# Altium PCB XL52832.PcbDoc
Units mil, origin at the board's own origin, x right, y up, seen from the top; angles counter-clockwise.
Board outline 6209.44 x 1934.03 mil, 2 copper layers (Top Layer, Bottom Layer); 12 components, 36 nets, 228 pads, 0 vias.
Unrouted connection lines stored in the file: 2.
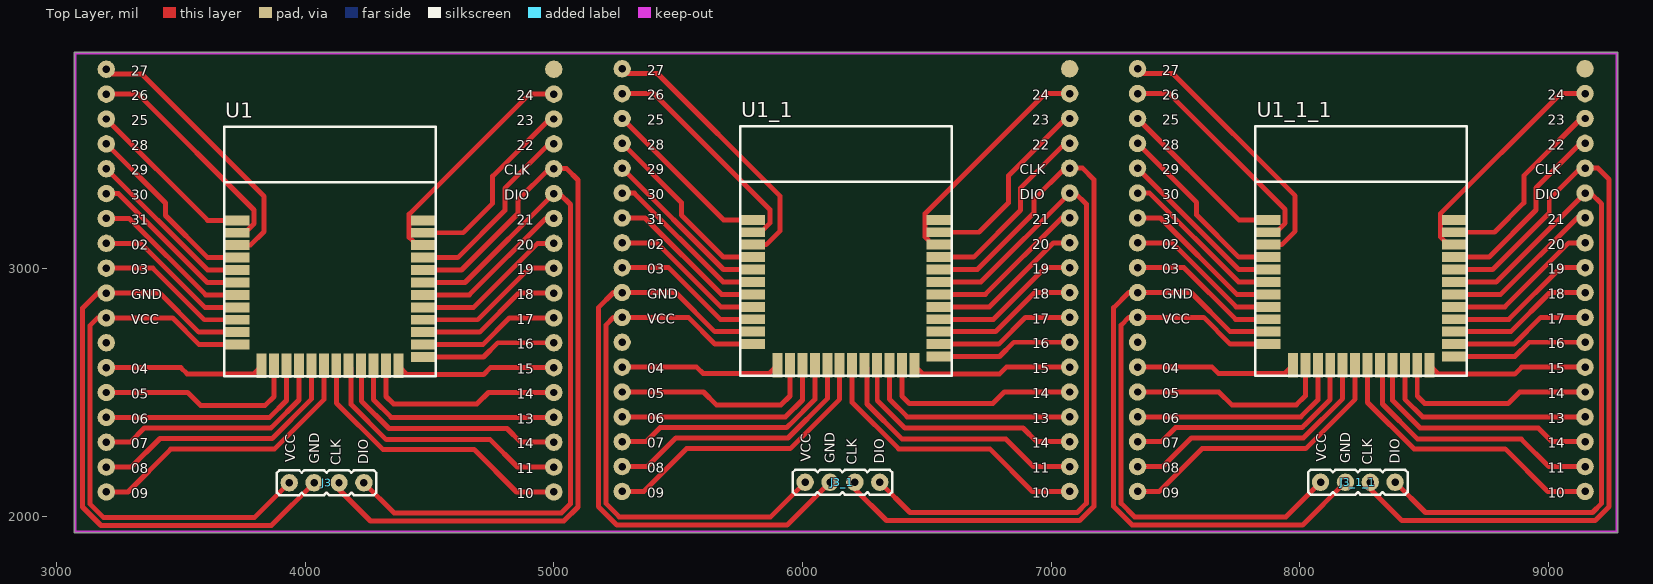
[diagram p0: Top Layer view]
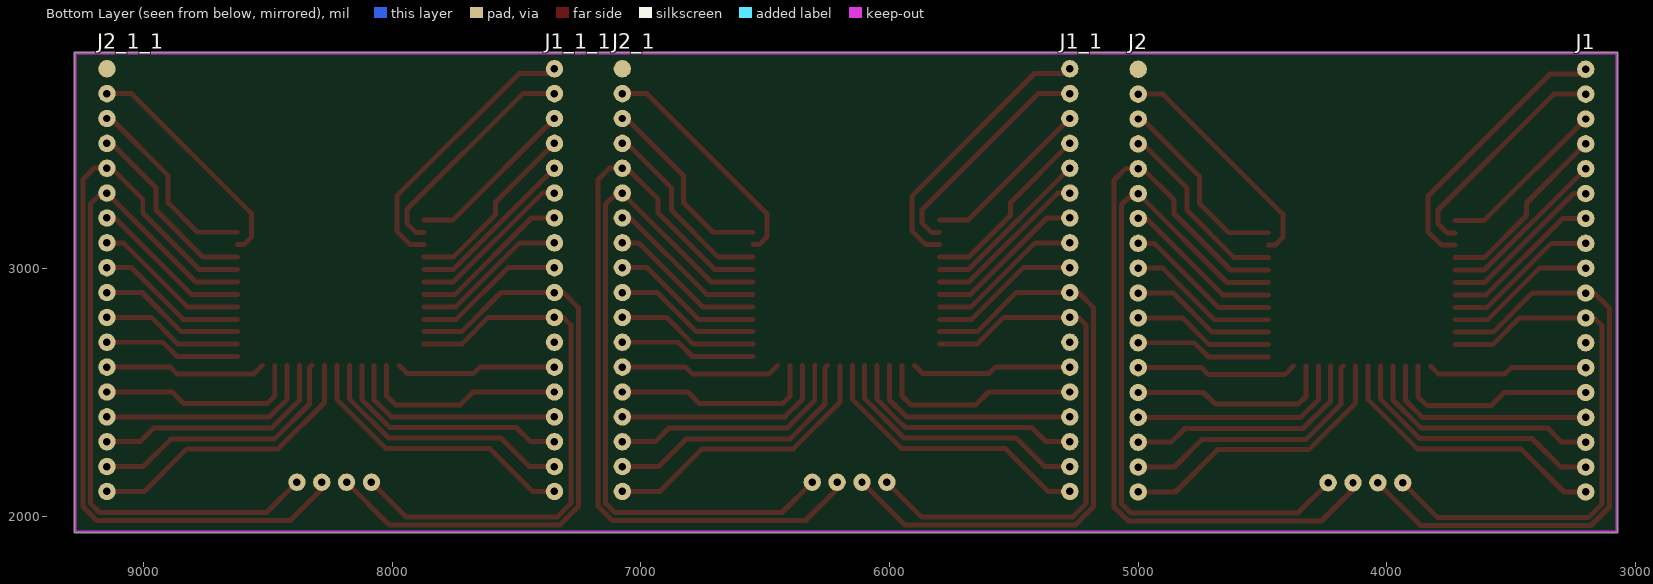
[diagram p1: Bottom Layer view, seen from below]

## Layer stack, top to bottom
Top Solder: solder mask 0.4, Solder Resist, Dk 3.5
Top Layer: signal copper 1.4
Dielectric 1: dielectric 12.6, FR-4, Dk 4.8
Bottom Layer: signal copper 1.4
Bottom Solder: solder mask 0.4, Solder Resist, Dk 3.5

## Board outline
3070.58,1940 ccw(c3075.59,1940) 3075.59,1934.98 9275,1934.98 ccw(c9275,1940) 9280.01,1940 9280.01,3864 ccw(c9275,3864) 9275,3869.01 3075.59,3869.01 ccw(c3075.59,3864) 3070.58,3864

## Design rules (kind name [scope] priority, off if disabled: settings)
Clearance [All] p1: gap=10 ignorepadtopadclearanceinfootprint=FALSE
PolygonConnect [All] p1: connectstyle=Relief reliefconductorwidth=10 reliefentries=4 polygonreliefangle="90 Angle" airgapwidth=10
RoutingVias [All] p1: holewidth=28 width=50 viastyle="Through Hole" minholewidth=28 minwidth=50 maxholewidth=28 maxwidth=50
SolderMaskExpansion [All] p1: expansion=4
Width [All] p1: maxlimit=40 minlimit=20 preferedwidth=30 minimp=50.000000 maximp=50.000000 favimp=50.000000
30 further rules are at their usual default settings.

## Classes and differential pairs
component class XL52832: J1 J2 J3 U1

## Components (designator, comment, footprint, x,y, rotation, side; value= is the part's Value field where it differs from the comment)
J1 "JP_18" JP_18#1 3050,2250 r0 bottom
J1_1 "JP_18" JP_18#1 5125,2252 r0 bottom (schematic designator J1)
J1_1_1 "JP_18" JP_18#1 7198,2252 r0 bottom (schematic designator J1)
J2 "JP_18" JP_18#2 5150,3650 r180 bottom
J2_1 "JP_18" JP_18#2 7225,3652 r180 bottom (schematic designator J2)
J2_1_1 "JP_18" JP_18#2 9298,3652 r180 bottom (schematic designator J2)
J3 "JP_4" JP_4 4236,2137 r180 top
J3_1 "JP_4" JP_4 6311,2139 r180 top (schematic designator J3)
J3_1_1 "JP_4" JP_4 8384,2139 r180 top (schematic designator J3)
U1 "XL52832-D01" XL52832-D01 4100,2900 r0 top
U1_1 "XL52832-D01" XL52832-D01 6175,2902 r0 top (schematic designator U1)
U1_1_1 "XL52832-D01" XL52832-D01 8248,2902 r0 top (schematic designator U1)

## Footprints (in the part's own frame and the unit in brackets; to place one, negate y for a bottom-side part, rotate by r counter-clockwise, add the part's x,y. Pads: shape width x height; smd on the part's side, far side on the other; paste and mask are expansions set on the pad)
JP_4 [mil]
  round 70 hole 30: 1(0,0) 2(100,0) 3(200,0) 4(300,0)
  silkscreen extent -50,-50 350,50, body extent -50,-50 350,50, height 336
JP_18#1 [mil]
  round 70 hole 30: 1(150,150) 2(150,50) 3(150,-50) 4(150,-150) 5(150,-250) 6(150,-350) 7(150,-450) 8(150,-550) 9(150,-650) 10(150,-750) 11(150,-850) 12(150,-950) 13(150,-1050) 14(150,-1150) 15(150,-1250) 16(150,-1350) 17(150,-1450) 18(150,-1550)
  body extent 100,-1600 200,200, height 336
JP_18#2 [mil]
  round 70 all layers, no hole: 1(150,150)
  round 70 hole 30: 2(150,50) 3(150,-50) 4(150,-150) 5(150,-250) 6(150,-350) 7(150,-450) 8(150,-550) 9(150,-650) 10(150,-750) 11(150,-850) 12(150,-950) 13(150,-1050) 14(150,-1150) 15(150,-1250) 16(150,-1350) 17(150,-1450) 18(150,-1550)
  body extent 100,-1600 200,200, height 336
XL52832-D01 [mil]
  rect 100x40 smd: 1(-375,292.5) 2(-375,242.5) 3(-375,192.5) 4(-375,142.5) 5(-375,92.5) 6(-375,42.5) 7(-375,-7.5) 8(-375,-57.5) 9(-375,-107.5) 10(-375,-157.5) 11(-375,-207.5) 25(375,-257.5) 26(375,-207.5) 27(375,-157.5) 28(375,-107.5) 29(375,-57.5) 30(375,-7.5) 31(375,42.5) 32(375,92.5) 33(375,142.5) 34(375,192.5) 35(375,242.5) 36(375,292.5)
  rect 0x0 smd: 12(-375,-257.5)
  rect 40x100 smd: 13(-275,-292.5) 14(-225,-292.5) 15(-175,-292.5) 16(-125,-292.5) 17(-75,-292.5) 18(-25,-292.5) 19(25,-292.5) 20(75,-292.5) 21(125,-292.5) 22(175,-292.5) 23(225,-292.5) 24(275,-292.5)
  silkscreen extent -426,-335 425,669, body extent -425,-338 425,666, height 177

## Nets (pads, with @x,y where several pads share a name; then routed paths per layer and width w, separated by ;. In a path a pad name is that pad's centre, name@x,y a point inside that pad or via, vN(x,y) a via of type N, cw(c..) or ccw(c..) an arc to the next point about the centre after c; other vN are vias at no path point)
CLK: J2.5 J3.2 U1.32 | length 3221.1
  Top Layer w20: J3.2 4136,2110 4263,1983 5040.43,1983 5097,2039.57 5097,3355 5052,3400 J2.5 4981,3400 4856,3275 4856,3220 4628.5,2992.5 U1.32
DIO: J2.6 J3.1 U1.31 | length 2859.2
  Top Layer w20: J3.1 4358,2015 5030,2015 5067,2052 5067,3256 5023,3300 J2.6 4642.5,2942.5 U1.31
GND: J1.9 J3.3 U1.10 | length 2545.1
  Top Layer w20: U1.10 3572.5,2742.5 3415,2900 J1.9 3165,2900 3104,2839 3104,2039.57 3178.57,1965 3864,1965 J3.3
NetJ1_1: J1.1 U1.18 | length 1165.2
  Top Layer w20: J1.1 3287,2100 3459,2272 3876,2272 4075,2471 U1.18
NetJ1_2: J1.2 U1.17 | length 1072.6
  Top Layer w20: J1.2 3301,2200 3416,2315 3867,2315 4025,2473 U1.17
NetJ1_3: J1.3 U1.16 | length 983.2
  Top Layer w20: J1.3 3296,2300 3353,2357 3862,2357 3875,2370 3875.43,2370 3975,2469.57 U1.16
NetJ1_4: J1.4 U1.15 | length 892.7
  Top Layer w20: J1.4 3857,2400 3925,2468 U1.15
NetJ1_5: J1.5 U1.14 | length 835
  Top Layer w20: J1.5 3527,2500 3579,2448 3839,2448 3875,2484 U1.14
NetJ1_6: J1.6 U1.13 | length 648.8
  Top Layer w20: J1.6 3500,2600 3525,2575 3792.5,2575 U1.13
NetJ1_7: J1.7 U1.12
NetJ1_10: J1.10 U1.9 | length 610.9
  Top Layer w20: J1.10 3387,3000 3594.5,2792.5 U1.9
NetJ1_11: J1.11 U1.8 | length 631.7
  Top Layer w20: J1.11 3339,3100 3596.5,2842.5 U1.8
NetJ1_12: J1.12 U1.7 | length 652.4
  Top Layer w20: J1.12 3292,3200 3599.5,2892.5 U1.7
NetJ1_13: J1.13 U1.6 | length 673.1
  Top Layer w20: J1.13 3249,3300 3606.5,2942.5 U1.6
NetJ1_14: J1.14 U1.5 | length 693.8
  Top Layer w20: J1.14 3607.5,2992.5 U1.5
NetJ1_15: J1.15 U1.4 | length 743.8
  Top Layer w20: J1.15 3438,3262 3438,3212 3607.5,3042.5 U1.4
NetJ1_16: J1.16 U1.1 | length 693.8
  Top Layer w20: J1.16 3607.5,3192.5 U1.1
NetJ1_17: J1.17 U1.2 | length 927.4
  Top Layer w20: J1.17 3328,3700 3794,3234 3794,3179 3756,3141 3726.5,3141 U1.2
NetJ1_18: J1.18 U1.3 | length 1119.2
  Top Layer w20: J1.18 3219,3781 3342,3781 3834,3289 3834,3147 3779.5,3092.5 U1.3
NetJ2_1: J2.1 U1.36
NetJ2_2: J2.2 U1.34 | length 945.1
  Top Layer w20: U1.34 4449.5,3092.5 4418,3124 4418,3217 4901,3700 J2.2
NetJ2_3: J2.3 U1.35 | length 778.4
  Top Layer w20: U1.35 4635.5,3142.5 4754,3261 4754,3370 4984,3600 J2.3
NetJ2_4: J2.4 U1.33 | length 766.6
  Top Layer w20: U1.33 4613.5,3042.5 4803,3232 4803,3321 4982,3500 J2.4
NetJ2_7: J2.7 U1.30 | length 652.4
  Top Layer w20: U1.30 4660.5,2892.5 4968,3200 J2.7
NetJ2_8: J2.8 U1.29 | length 631.7
  Top Layer w20: U1.29 4677.5,2842.5 4935,3100 J2.8
NetJ2_9: J2.9 U1.28 | length 610.9
  Top Layer w20: U1.28 4693.5,2792.5 4901,3000 J2.9
NetJ2_10: J2.10 U1.27 | length 590.2
  Top Layer w20: U1.27 4701.5,2742.5 4859,2900 J2.10
NetJ2_11: J2.11 U1.26 | length 569.5
  Top Layer w20: U1.26 4714.5,2692.5 4822,2800 J2.11
NetJ2_12: J2.12 U1.25 | length 548.8
  Top Layer w20: U1.25 4717.5,2642.5 4775,2700 J2.12
NetJ2_13: J2.13 U1.24 | length 651.3
  Top Layer w20: U1.24 4410.5,2572 4717,2572 4745,2600 J2.13
NetJ2_14: J2.14 U1.23 | length 830
  Top Layer w20: U1.23 4325,2484 4355,2454 4691,2454 4737,2500 J2.14
NetJ2_15: J2.15 U1.22 | length 890.9
  Top Layer w20: U1.22 4275,2471 4346,2400 J2.15
NetJ2_16: J2.16 U1.21 | length 984.7
  Top Layer w20: U1.21 4226,2606.5 4226,2466 4337,2355 4812,2355 4867,2300 J2.16
NetJ2_17: J2.17 U1.20 | length 1079.4
  Top Layer w20: U1.20 4185,2597.5 4185,2451.43 4326.43,2310 4744,2310 4854,2200 J2.17
NetJ2_18: J2.18 U1.19 | length 1172.8
  Top Layer w20: U1.19 4125,2458 4312,2271 4679,2271 4850,2100 J2.18
VCC: J1.8 J3.4 U1.11 | length 2247.3
  Top Layer w20: U1.11 3573.5,2692.5 3466,2800 J1.8 3165,2800 3134,2769 3134,2052 3188,1998 3797,1998 J3.4
pads on no net: J1_1.1 J1_1.2 J1_1.3 J1_1.4 J1_1.5 J1_1.6 J1_1.7 J1_1.8 J1_1.9 J1_1.10 J1_1.11 J1_1.12 J1_1.13 J1_1.14 J1_1.15 J1_1.16 J1_1.17 J1_1.18 J1_1_1.1 J1_1_1.2 J1_1_1.3 J1_1_1.4 J1_1_1.5 J1_1_1.6 J1_1_1.7 J1_1_1.8 J1_1_1.9 J1_1_1.10 J1_1_1.11 J1_1_1.12 J1_1_1.13 J1_1_1.14 J1_1_1.15 J1_1_1.16 J1_1_1.17 J1_1_1.18 J2_1.1 J2_1.2 J2_1.3 J2_1.4 J2_1.5 J2_1.6 J2_1.7 J2_1.8 J2_1.9 J2_1.10 J2_1.11 J2_1.12 J2_1.13 J2_1.14 J2_1.15 J2_1.16 J2_1.17 J2_1.18 J2_1_1.1 J2_1_1.2 J2_1_1.3 J2_1_1.4 J2_1_1.5 J2_1_1.6 J2_1_1.7 J2_1_1.8 J2_1_1.9 J2_1_1.10 J2_1_1.11 J2_1_1.12 J2_1_1.13 J2_1_1.14 J2_1_1.15 J2_1_1.16 J2_1_1.17 J2_1_1.18 J3_1.1 J3_1.2 J3_1.3 J3_1.4 J3_1_1.1 J3_1_1.2 J3_1_1.3 J3_1_1.4 U1_1.1 U1_1.2 U1_1.3 U1_1.4 U1_1.5 U1_1.6 U1_1.7 U1_1.8 U1_1.9 U1_1.10 U1_1.11 U1_1.12 U1_1.13 U1_1.14 U1_1.15 U1_1.16 U1_1.17 U1_1.18 U1_1.19 U1_1.20 U1_1.21 U1_1.22 U1_1.23 U1_1.24 U1_1.25 U1_1.26 U1_1.27 U1_1.28 U1_1.29 U1_1.30 U1_1.31 U1_1.32 U1_1.33 U1_1.34 U1_1.35 U1_1.36 U1_1_1.1 U1_1_1.2 U1_1_1.3 U1_1_1.4 U1_1_1.5 U1_1_1.6 U1_1_1.7 U1_1_1.8 U1_1_1.9 U1_1_1.10 U1_1_1.11 U1_1_1.12 U1_1_1.13 U1_1_1.14 U1_1_1.15 U1_1_1.16 U1_1_1.17 U1_1_1.18 U1_1_1.19 U1_1_1.20 U1_1_1.21 U1_1_1.22 U1_1_1.23 U1_1_1.24 U1_1_1.25 U1_1_1.26 U1_1_1.27 U1_1_1.28 U1_1_1.29 U1_1_1.30 U1_1_1.31 U1_1_1.32 U1_1_1.33 U1_1_1.34 U1_1_1.35 U1_1_1.36
copper on no net: | length 69837.5
  Top Layer w20: 5275,2102 5362,2102 5534,2274 5951,2274 6150,2473 6150,2609.5 ; 5275,2202 5376,2202 5491,2317 5942,2317 6100,2475 6100,2609.5 ; 5275,2302 5371,2302 5428,2359 5937,2359 5950,2372 5950.43,2372 6050,2471.57 6050,2609.5 ; 5275,2402 5932,2402 6000,2470 6000,2609.5 ; 5275,2502 5602,2502 5654,2450 5914,2450 5950,2486 5950,2609.5 ; 5275,2602 5575,2602 5600,2577 5867.5,2577 5900,2609.5 ; 5275,3002 5462,3002 5669.5,2794.5 5800,2794.5 ; 5275,3102 5414,3102 5671.5,2844.5 5800,2844.5 ; 5275,3202 5367,3202 5674.5,2894.5 5800,2894.5 ; 5275,3302 5324,3302 5681.5,2944.5 5800,2944.5 ; 5275,3402 5682.5,2994.5 5800,2994.5 ; 5275,3502 5513,3264 5513,3214 5682.5,3044.5 5800,3044.5 ; 5275,3602 5682.5,3194.5 5800,3194.5 ; 5275,3702 5403,3702 5869,3236 5869,3181 5831,3143 5801.5,3143 5800,3144.5 ; 5275,3802 5294,3783 5417,3783 5909,3291 5909,3149 5854.5,3094.5 5800,3094.5 ; 5800,2694.5 5648.5,2694.5 5541,2802 5275,2802 5240,2802 5209,2771 5209,2054 5263,2000 5872,2000 6011,2139 ; 5800,2744.5 5647.5,2744.5 5490,2902 5275,2902 5240,2902 5179,2841 5179,2041.57 5253.57,1967 5939,1967 6111,2139 ; 6200,2609.5 6200,2460 6387,2273 6754,2273 6925,2102 7075,2102 ; 6211,2139 6211,2112 6338,1985 7115.43,1985 7172,2041.57 7172,3357 7127,3402 7075,3402 7056,3402 6931,3277 6931,3222 6703.5,2994.5 6550,2994.5 ; 6250,2609.5 6260,2599.5 6260,2453.43 6401.43,2312 6819,2312 6929,2202 7075,2202 ; 6300,2609.5 6301,2608.5 6301,2468 6412,2357 6887,2357 6942,2302 7075,2302 ; 6311,2139 6433,2017 7105,2017 7142,2054 7142,3258 7098,3302 7075,3302 6717.5,2944.5 6550,2944.5 ; 6350,2609.5 6350,2473 6421,2402 7075,2402 ; 6400,2609.5 6400,2486 6430,2456 6766,2456 6812,2502 7075,2502 ; 6450,2609.5 6485.5,2574 6792,2574 6820,2602 7075,2602 ; 6550,2644.5 6792.5,2644.5 6850,2702 7075,2702 ; 6550,2694.5 6789.5,2694.5 6897,2802 7075,2802 ; 6550,2744.5 6776.5,2744.5 6934,2902 7075,2902 ; 6550,2794.5 6768.5,2794.5 6976,3002 7075,3002 ; 6550,2844.5 6752.5,2844.5 7010,3102 7075,3102 ; 6550,2894.5 6735.5,2894.5 7043,3202 7075,3202 ; 6550,3044.5 6688.5,3044.5 6878,3234 6878,3323 7057,3502 7075,3502 ; 6550,3094.5 6524.5,3094.5 6493,3126 6493,3219 6976,3702 7075,3702 ; 6550,3144.5 6710.5,3144.5 6829,3263 6829,3372 7059,3602 7075,3602 ; 7348,2102 7435,2102 7607,2274 8024,2274 8223,2473 8223,2609.5 ; 7348,2202 7449,2202 7564,2317 8015,2317 8173,2475 8173,2609.5 ; 7348,2302 7444,2302 7501,2359 8010,2359 8023,2372 8023.43,2372 8123,2471.57 8123,2609.5 ; 7348,2402 8005,2402 8073,2470 8073,2609.5 ; 7348,2502 7675,2502 7727,2450 7987,2450 8023,2486 8023,2609.5 ; 7348,2602 7648,2602 7673,2577 7940.5,2577 7973,2609.5 ; 7348,3002 7535,3002 7742.5,2794.5 7873,2794.5 ; 7348,3102 7487,3102 7744.5,2844.5 7873,2844.5 ; 7348,3202 7440,3202 7747.5,2894.5 7873,2894.5 ; 7348,3302 7397,3302 7754.5,2944.5 7873,2944.5 ; 7348,3402 7755.5,2994.5 7873,2994.5 ; 7348,3502 7586,3264 7586,3214 7755.5,3044.5 7873,3044.5 ; 7348,3602 7755.5,3194.5 7873,3194.5 ; 7348,3702 7476,3702 7942,3236 7942,3181 7904,3143 7874.5,3143 7873,3144.5 ; 7348,3802 7367,3783 7490,3783 7982,3291 7982,3149 7927.5,3094.5 7873,3094.5 ; 7873,2694.5 7721.5,2694.5 7614,2802 7348,2802 7313,2802 7282,2771 7282,2054 7336,2000 7945,2000 8084,2139 ; 7873,2744.5 7720.5,2744.5 7563,2902 7348,2902 7313,2902 7252,2841 7252,2041.57 7326.57,1967 8012,1967 8184,2139 ; 8273,2609.5 8273,2460 8460,2273 8827,2273 8998,2102 9148,2102 ; 8284,2139 8284,2112 8411,1985 9188.43,1985 9245,2041.57 9245,3357 9200,3402 9148,3402 9129,3402 9004,3277 9004,3222 8776.5,2994.5 8623,2994.5 ; 8323,2609.5 8333,2599.5 8333,2453.43 8474.43,2312 8892,2312 9002,2202 9148,2202 ; 8373,2609.5 8374,2608.5 8374,2468 8485,2357 8960,2357 9015,2302 9148,2302 ; 8384,2139 8506,2017 9178,2017 9215,2054 9215,3258 9171,3302 9148,3302 8790.5,2944.5 8623,2944.5 ; 8423,2609.5 8423,2473 8494,2402 9148,2402 ; 8473,2609.5 8473,2486 8503,2456 8839,2456 8885,2502 9148,2502 ; 8523,2609.5 8558.5,2574 8865,2574 8893,2602 9148,2602 ; 8623,2644.5 8865.5,2644.5 8923,2702 9148,2702 ; 8623,2694.5 8862.5,2694.5 8970,2802 9148,2802 ; 8623,2744.5 8849.5,2744.5 9007,2902 9148,2902 ; 8623,2794.5 8841.5,2794.5 9049,3002 9148,3002 ; 8623,2844.5 8825.5,2844.5 9083,3102 9148,3102 ; 8623,2894.5 8808.5,2894.5 9116,3202 9148,3202 ; 8623,3044.5 8761.5,3044.5 8951,3234 8951,3323 9130,3502 9148,3502 ; 8623,3094.5 8597.5,3094.5 8566,3126 8566,3219 9049,3702 9148,3702 ; 8623,3144.5 8783.5,3144.5 8902,3263 8902,3372 9132,3602 9148,3602

## Keep-outs
Keep-Out Layer:
  lines w10: 3075.59,1940 9275,1940 9275,3864 3075.59,3864 3075.59,1940

## Silkscreen, mask and mechanical layers (free items; w line width, h text height)
Top Overlay:
  text "27" at 5375,3777 h40
  text "27" at 7448,3777 h40
  text "27" at 3300,3775 h40
  text "26" at 5375,3677 h40
  text "24" at 6925,3677 h40
  text "26" at 7448,3677 h40
  text "24" at 8998,3677 h40
  text "26" at 3300,3675 h40
  text "24" at 4850,3675 h40
  text "25" at 5375,3577 h40
  text "23" at 6925,3577 h40
  text "25" at 7448,3577 h40
  text "23" at 8998,3577 h40
  text "25" at 3300,3575 h40
  text "23" at 4850,3575 h40
  text "28" at 5375,3477 h40
  text "22" at 6925,3477 h40
  text "28" at 7448,3477 h40
  text "22" at 8998,3477 h40
  text "28" at 3300,3475 h40
  text "22" at 4850,3475 h40
  text "29" at 5375,3377 h40
  text "CLK" at 6875,3377 h40
  text "29" at 7448,3377 h40
  text "CLK" at 8948,3377 h40
  text "29" at 3300,3375 h40
  text "CLK" at 4800,3375 h40
  text "30" at 5375,3277 h40
  text "DIO" at 6875,3277 h40
  text "30" at 7448,3277 h40
  text "DIO" at 8948,3277 h40
  text "30" at 3300,3275 h40
  text "DIO" at 4800,3275 h40
  text "31" at 5375,3177 h40
  text "21" at 6925,3177 h40
  text "31" at 7448,3177 h40
  text "21" at 8998,3177 h40
  text "31" at 3300,3175 h40
  text "21" at 4850,3175 h40
  text "02" at 5375,3077 h40
  text "20" at 6925,3077 h40
  text "02" at 7448,3077 h40
  text "20" at 8998,3077 h40
  text "02" at 3300,3075 h40
  text "20" at 4850,3075 h40
  text "03" at 5375,2977 h40
  text "19" at 6925,2977 h40
  text "03" at 7448,2977 h40
  text "19" at 8998,2977 h40
  text "03" at 3300,2975 h40
  text "19" at 4850,2975 h40
  text "GND" at 5375,2877 h40
  text "18" at 6925,2877 h40
  text "GND" at 7448,2877 h40
  text "18" at 8998,2877 h40
  text "GND" at 3300,2875 h40
  text "18" at 4850,2875 h40
  text "VCC" at 5375,2777 h40
  text "17" at 6925,2777 h40
  text "VCC" at 7448,2777 h40
  text "17" at 8998,2777 h40
  text "VCC" at 3300,2775 h40
  text "17" at 4850,2775 h40
  text "16" at 6925,2677 h40
  text "16" at 8998,2677 h40
  text "16" at 4850,2675 h40
  text "04" at 5375,2577 h40
  text "15" at 6925,2577 h40
  text "04" at 7448,2577 h40
  text "15" at 8998,2577 h40
  text "04" at 3300,2575 h40
  text "15" at 4850,2575 h40
  text "05" at 5375,2477 h40
  text "14" at 6925,2477 h40
  text "05" at 7448,2477 h40
  text "14" at 8998,2477 h40
  text "05" at 3300,2475 h40
  text "14" at 4850,2475 h40
  text "06" at 5375,2377 h40
  text "13" at 6925,2377 h40
  text "06" at 7448,2377 h40
  text "13" at 8998,2377 h40
  text "06" at 3300,2375 h40
  text "13" at 4850,2375 h40
  text "07" at 5375,2277 h40
  text "14" at 6925,2277 h40
  text "07" at 7448,2277 h40
  text "14" at 8998,2277 h40
  text "07" at 3300,2275 h40
  text "14" at 4850,2275 h40
  text "VCC" at 6034,2221 h40 r90
  text "VCC" at 8107,2221 h40 r90
  text "VCC" at 3959,2219 h40 r90
  text "GND" at 6131,2216 h40 r90
  text "GND" at 8204,2216 h40 r90
  text "GND" at 4056,2214 h40 r90
  text "DIO" at 6329,2213 h40 r90
  text "DIO" at 8402,2213 h40 r90
  text "DIO" at 4254,2211 h40 r90
  text "CLK" at 6219,2210 h40 r90
  text "CLK" at 8292,2210 h40 r90
  text "CLK" at 4144,2208 h40 r90
  text "08" at 5375,2177 h40
  text "11" at 6925,2177 h40
  text "08" at 7448,2177 h40
  text "11" at 8998,2177 h40
  text "08" at 3300,2175 h40
  text "11" at 4850,2175 h40
  text "09" at 5375,2077 h40
  text "10" at 6925,2077 h40
  text "09" at 7448,2077 h40
  text "10" at 8998,2077 h40
  text "09" at 3300,2075 h40
  text "10" at 4850,2075 h40